# EAGLE board fnordlichtmini_v4_panelized (EAGLE 6.1)
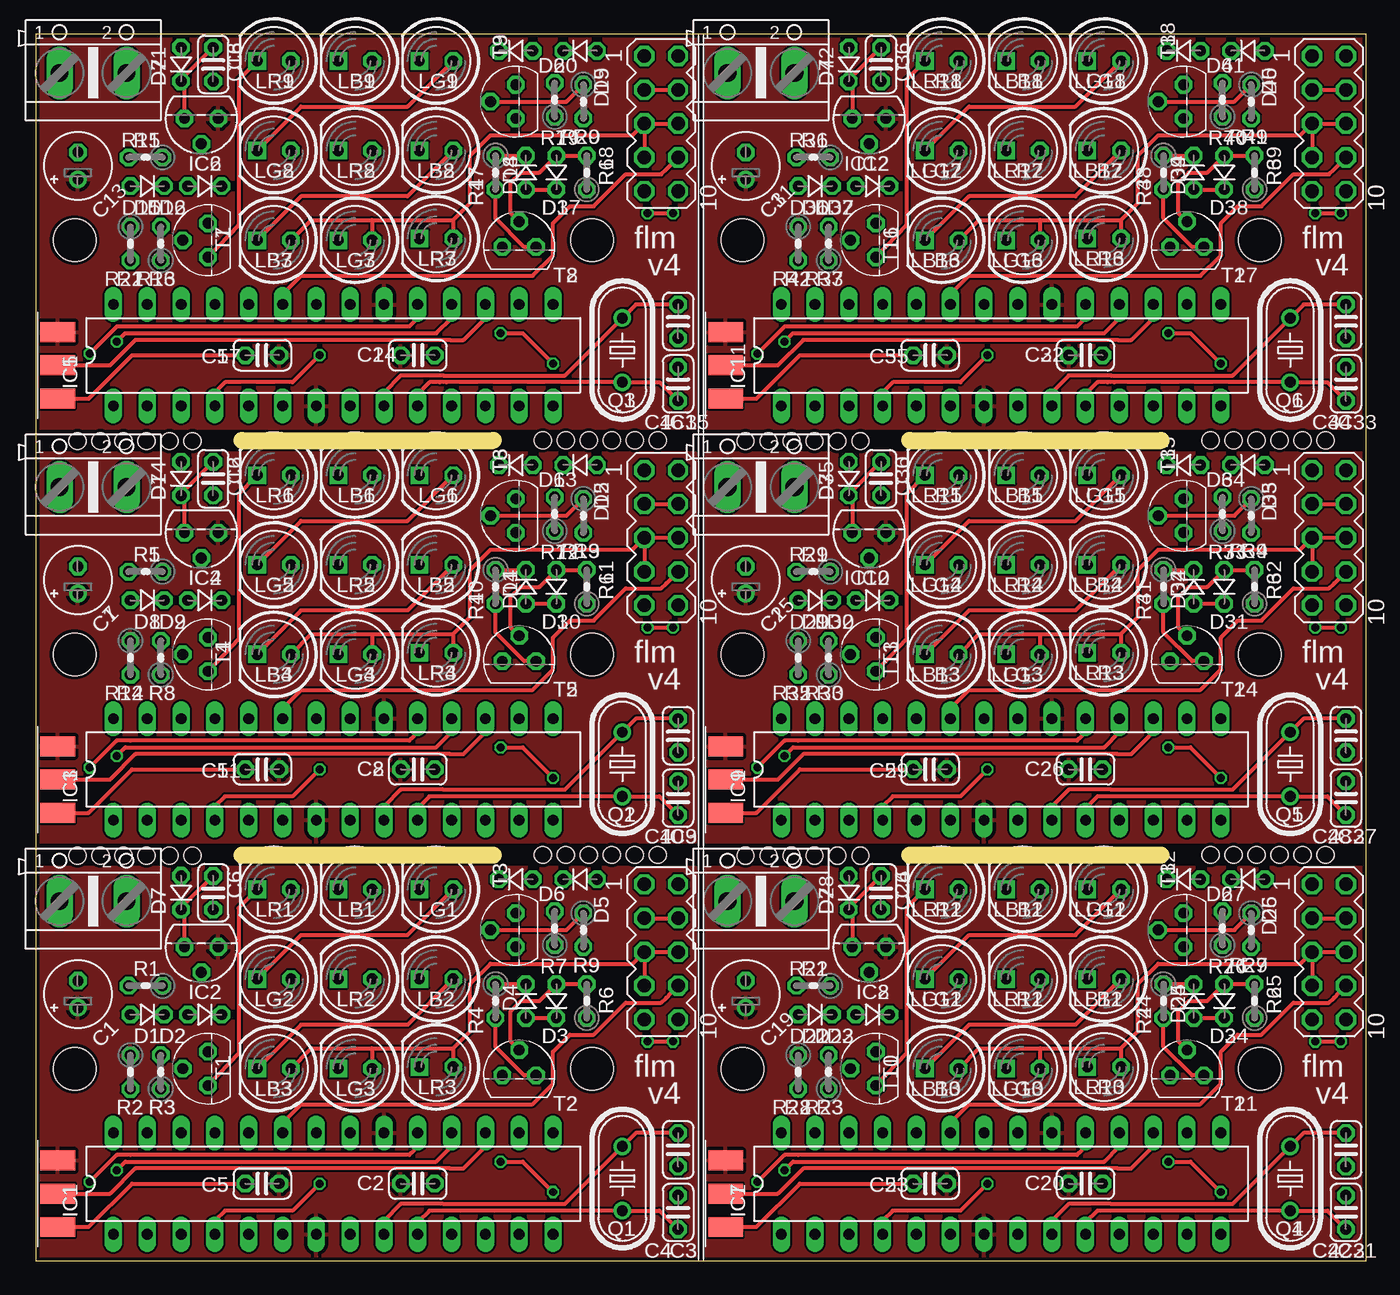
[diagram p0: board, top side]
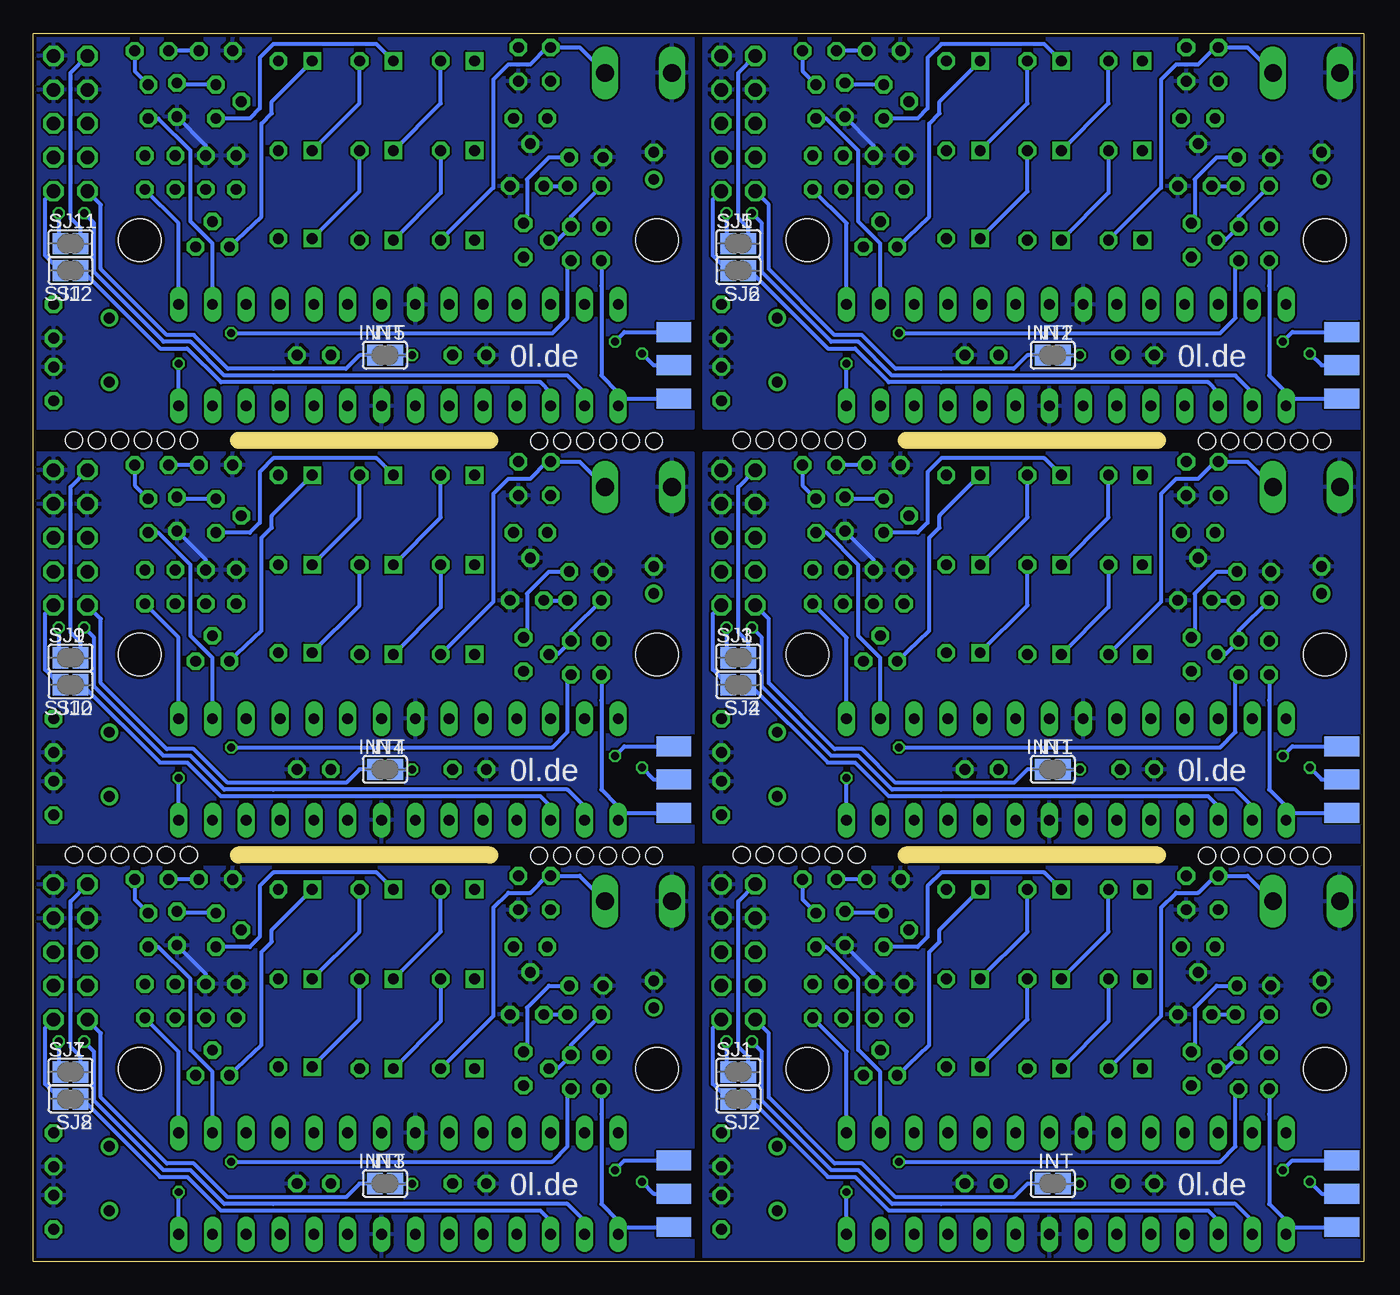
[diagram p1: board, bottom side, seen from below]

Size 99.95 x 92.2 mm. Coordinates in mm from the lower left corner, seen from the top.
Outline: 99.95,0 0,0 0,92.2 99.95,92.2 99.95,0
Copper layers (1*16): Top 0.035mm / dielectric 1.5mm / Bottom 0.035mm
Design rules: minimum track width 6mil, minimum drill 12mil, track to track 6mil, track to pad 6mil, pad to pad 6mil, via to via 6mil, smd to smd 0mil, copper to edge 10mil, drill to drill 10mil, minimum pad ring 10mil, minimum via ring 6mil, stop-mask expansion 2mil, vias tented up to drill 100mil, thermal gap 10mil
Holes 3.2 mm at 2.92,14.48 41.78,14.48 2.92,45.59 41.78,45.59 2.92,76.71 41.78,76.71 53.09,14.48 91.95,14.48 53.09,45.59 91.95,45.59 53.09,76.71 91.95,76.71
Holes 1.27 mm at 3.15,61.62 4.88,61.62 6.6,61.62 8.33,61.62 10.06,61.62 11.79,61.62 38.1,61.67 39.83,61.67 41.55,61.67 43.28,61.67 45.01,61.67 46.74,61.67 3.15,30.48 4.88,30.48 6.6,30.48 8.33,30.48 10.06,30.48 11.79,30.48 38.1,30.53 39.83,30.53 41.55,30.53 43.28,30.53 45.01,30.53 46.74,30.53 53.31,61.62 55.04,61.62 56.77,61.62 58.5,61.62 60.22,61.62 61.95,61.62 88.27,61.67 89.99,61.67 91.72,61.67 93.45,61.67 95.17,61.67 96.9,61.67 53.31,30.48 55.04,30.48 56.77,30.48 58.5,30.48 60.22,30.48 61.95,30.48 88.27,30.53 89.99,30.53 91.72,30.53 93.45,30.53 95.17,30.53 96.9,30.53
Milling: 4 lines

## Footprints (pad centres in the part's own frame; a part is rotated, then mirrored left to right if it is on the bottom)
E2-5 = drill 0.813 pad 1.27: + -1.016,0 | drill 0.813 pad 1.27 octagon: - 1.016,0
C025-024X044 = drill 0.813 octagon: 1 -1.27,0; 2 1.27,0
D-2.5 = drill 0.813 octagon: A 1.27,0; C -1.27,0
DIL28-3 = drill 0.813 long: 1 -16.51,-3.81; 2 -13.97,-3.81; 3 -11.43,-3.81; 4 -8.89,-3.81; 5 -6.35,-3.81; 6 -3.81,-3.81; 7 -1.27,-3.81; 8 1.27,-3.81; 9 3.81,-3.81; 10 6.35,-3.81; 11 8.89,-3.81; 12 11.43,-3.81; 13 13.97,-3.81; 14 16.51,-3.81; 15 16.51,3.81; 16 13.97,3.81; 17 11.43,3.81; 18 8.89,3.81; 19 6.35,3.81; 20 3.81,3.81; 21 1.27,3.81; 22 -1.27,3.81; 23 -3.81,3.81; 24 -6.35,3.81; 25 -8.89,3.81; 26 -11.43,3.81; 27 -13.97,3.81; 28 -16.51,3.81
TO92 = drill 0.813 octagon: 1 -1.27,0; 2 0,1.905; 3 1.27,0
SJ = smd 1.168 x 1.6: 1 -0.762,0; 2 0.762,0
LED5MM = drill 0.813 octagon: A -1.27,0 | drill 0.813 square: K 1.27,0
HC49U-V = drill 0.813: 1 -2.413,0; 2 2.413,0
0204V = drill 0.813 octagon: 1 -1.27,0; 2 1.27,0
MA05-2 = drill 1.016 octagon: 1 -5.08,-1.27; 2 -5.08,1.27; 3 -2.54,-1.27; 4 -2.54,1.27; 5 0,-1.27; 6 0,1.27; 7 2.54,-1.27; 8 2.54,1.27; 9 5.08,-1.27; 10 5.08,1.27
TO92' = drill 0.813 octagon: 1 1.27,0; 2 0,1.905; 3 -1.27,0
6PAD_ISP = smd 1.5 x 2.6: GND -2.5,0.5; MOSI 0,0.5; VCC 2.5,0.5 | smd 1.5 x 2.6 bottom: MISO 2.5,0.5; RST -2.5,0.5; SCK 0,0.5
AK500/2 = drill 1.321 long: 1 -2.515,0; 2 2.515,0

## Placement (x,y rotation side)
C1  47uF  [E2-5]  3.17,20.07 90 top
C2  100n  [C025-024X044]  28.7,5.84 0 top
C3  33p  [C025-024X044]  48.26,8.38 270 top
C4  33p  [C025-024X044]  48.26,3.68 90 top
C5  100n  [C025-024X044]  17.02,5.84 180 top
C6  100n  [C025-024X044]  13.34,27.69 270 top
C7  47uF  [E2-5]  3.17,51.18 90 top
C8  100n  [C025-024X044]  28.7,36.96 0 top
C9  33p  [C025-024X044]  48.26,39.5 270 top
C10  33p  [C025-024X044]  48.26,34.8 90 top
C11  100n  [C025-024X044]  17.02,36.96 180 top
C12  100n  [C025-024X044]  13.34,58.8 270 top
C13  47uF  [E2-5]  3.17,82.3 90 top
C14  100n  [C025-024X044]  28.7,68.07 0 top
C15  33p  [C025-024X044]  48.26,70.61 270 top
C16  33p  [C025-024X044]  48.26,65.91 90 top
C17  100n  [C025-024X044]  17.02,68.07 180 top
C18  100n  [C025-024X044]  13.34,89.92 270 top
C19  47uF  [E2-5]  53.34,20.07 90 top
C20  100n  [C025-024X044]  78.87,5.84 0 top
C21  33p  [C025-024X044]  98.42,8.38 270 top
C22  33p  [C025-024X044]  98.42,3.68 90 top
C23  100n  [C025-024X044]  67.18,5.84 180 top
C24  100n  [C025-024X044]  63.5,27.69 270 top
C25  47uF  [E2-5]  53.34,51.18 90 top
C26  100n  [C025-024X044]  78.87,36.96 0 top
C27  33p  [C025-024X044]  98.42,39.5 270 top
C28  33p  [C025-024X044]  98.42,34.8 90 top
C29  100n  [C025-024X044]  67.18,36.96 180 top
C30  100n  [C025-024X044]  63.5,58.8 270 top
C31  47uF  [E2-5]  53.34,82.3 90 top
C32  100n  [C025-024X044]  78.87,68.07 0 top
C33  33p  [C025-024X044]  98.42,70.61 270 top
C34  33p  [C025-024X044]  98.42,65.91 90 top
C35  100n  [C025-024X044]  67.18,68.07 180 top
C36  100n  [C025-024X044]  63.5,89.92 270 top
D1  [D-2.5]  8.38,18.54 180 top
D2  [D-2.5]  12.7,18.54 180 top
D3  [D-2.5]  39.12,19.56 90 top
D4  [D-2.5]  36.83,19.56 270 top
D5  [D-2.5]  40.89,28.7 0 top
D6  [D-2.5]  36.07,28.7 0 top
D7  [D-2.5]  10.92,27.69 90 top
D8  [D-2.5]  8.38,49.66 180 top
D9  [D-2.5]  12.7,49.66 180 top
D10  [D-2.5]  39.12,50.67 90 top
D11  [D-2.5]  36.83,50.67 270 top
D12  [D-2.5]  40.89,59.82 0 top
D13  [D-2.5]  36.07,59.82 0 top
D14  [D-2.5]  10.92,58.8 90 top
D15  [D-2.5]  8.38,80.77 180 top
D16  [D-2.5]  12.7,80.77 180 top
D17  [D-2.5]  39.12,81.79 90 top
D18  [D-2.5]  36.83,81.79 270 top
D19  [D-2.5]  40.89,90.93 0 top
D20  [D-2.5]  36.07,90.93 0 top
D21  [D-2.5]  10.92,89.92 90 top
D22  [D-2.5]  58.55,18.54 180 top
D23  [D-2.5]  62.87,18.54 180 top
D24  [D-2.5]  89.28,19.56 90 top
D25  [D-2.5]  87,19.56 270 top
D26  [D-2.5]  91.06,28.7 0 top
D27  [D-2.5]  86.23,28.7 0 top
D28  [D-2.5]  61.09,27.69 90 top
D29  [D-2.5]  58.55,49.66 180 top
D30  [D-2.5]  62.87,49.66 180 top
D31  [D-2.5]  89.28,50.67 90 top
D32  [D-2.5]  87,50.67 270 top
D33  [D-2.5]  91.06,59.82 0 top
D34  [D-2.5]  86.23,59.82 0 top
D35  [D-2.5]  61.09,58.8 90 top
D36  [D-2.5]  58.55,80.77 180 top
D37  [D-2.5]  62.87,80.77 180 top
D38  [D-2.5]  89.28,81.79 90 top
D39  [D-2.5]  87,81.79 270 top
D40  [D-2.5]  91.06,90.93 0 top
D41  [D-2.5]  86.23,90.93 0 top
D42  [D-2.5]  61.09,89.92 90 top
IC1  MEGA8-P  [DIL28-3]  22.35,5.84 0 top
IC2  78L05Z  [TO92]  12.45,23.62 180 top
IC3  MEGA8-P  [DIL28-3]  22.35,36.96 0 top
IC4  78L05Z  [TO92]  12.45,54.74 180 top
IC5  MEGA8-P  [DIL28-3]  22.35,68.07 0 top
IC6  78L05Z  [TO92]  12.45,85.85 180 top
IC7  MEGA8-P  [DIL28-3]  72.52,5.84 0 top
IC8  78L05Z  [TO92]  62.61,23.62 180 top
IC9  MEGA8-P  [DIL28-3]  72.52,36.96 0 top
IC10  78L05Z  [TO92]  62.61,54.74 180 top
IC11  MEGA8-P  [DIL28-3]  72.52,68.07 0 top
IC12  78L05Z  [TO92]  62.61,85.85 180 top
INT  [SJ]  23.37,5.84 180 bottom
INT1  [SJ]  23.37,36.96 180 bottom
INT2  [SJ]  23.37,68.07 180 bottom
INT3  [SJ]  73.53,5.84 180 bottom
INT4  [SJ]  73.53,36.96 180 bottom
INT5  [SJ]  73.53,68.07 180 bottom
LB1  [LED5MM]  24,27.94 180 top
LB2  [LED5MM]  30.1,21.21 180 top
LB3  [LED5MM]  17.91,14.48 180 top
LB4  [LED5MM]  17.91,45.59 180 top
LB5  [LED5MM]  30.1,52.32 180 top
LB6  [LED5MM]  24,59.05 180 top
LB7  [LED5MM]  17.91,76.71 180 top
LB8  [LED5MM]  30.1,83.44 180 top
LB9  [LED5MM]  24,90.17 180 top
LB10  [LED5MM]  68.07,14.48 180 top
LB11  [LED5MM]  80.26,21.21 180 top
LB12  [LED5MM]  74.17,27.94 180 top
LB13  [LED5MM]  68.07,45.59 180 top
LB14  [LED5MM]  80.26,52.32 180 top
LB15  [LED5MM]  74.17,59.05 180 top
LB16  [LED5MM]  68.07,76.71 180 top
LB17  [LED5MM]  80.26,83.44 180 top
LB18  [LED5MM]  74.17,90.17 180 top
LG1  [LED5MM]  30.1,27.94 180 top
LG2  [LED5MM]  17.91,21.21 180 top
LG3  [LED5MM]  24,14.48 180 top
LG4  [LED5MM]  24,45.59 180 top
LG5  [LED5MM]  17.91,52.32 180 top
LG6  [LED5MM]  30.1,59.05 180 top
LG7  [LED5MM]  24,76.71 180 top
LG8  [LED5MM]  17.91,83.44 180 top
LG9  [LED5MM]  30.1,90.17 180 top
LG10  [LED5MM]  74.17,14.48 180 top
LG11  [LED5MM]  68.07,21.21 180 top
LG12  [LED5MM]  80.26,27.94 180 top
LG13  [LED5MM]  74.17,45.59 180 top
LG14  [LED5MM]  68.07,52.32 180 top
LG15  [LED5MM]  80.26,59.05 180 top
LG16  [LED5MM]  74.17,76.71 180 top
LG17  [LED5MM]  68.07,83.44 180 top
LG18  [LED5MM]  80.26,90.17 180 top
LR1  [LED5MM]  17.91,27.94 180 top
LR2  [LED5MM]  24,21.21 180 top
LR3  [LED5MM]  30.1,14.61 180 top
LR4  [LED5MM]  30.1,45.72 180 top
LR5  [LED5MM]  24,52.32 180 top
LR6  [LED5MM]  17.91,59.05 180 top
LR7  [LED5MM]  30.1,76.83 180 top
LR8  [LED5MM]  24,83.44 180 top
LR9  [LED5MM]  17.91,90.17 180 top
LR10  [LED5MM]  80.26,14.61 180 top
LR11  [LED5MM]  74.17,21.21 180 top
LR12  [LED5MM]  68.07,27.94 180 top
LR13  [LED5MM]  80.26,45.72 180 top
LR14  [LED5MM]  74.17,52.32 180 top
LR15  [LED5MM]  68.07,59.05 180 top
LR16  [LED5MM]  80.26,76.83 180 top
LR17  [LED5MM]  74.17,83.44 180 top
LR18  [LED5MM]  68.07,90.17 180 top
Q1  16MHz  [HC49U-V]  44.07,6.22 270 top
Q2  16MHz  [HC49U-V]  44.07,37.34 270 top
Q3  16MHz  [HC49U-V]  44.07,68.45 270 top
Q4  16MHz  [HC49U-V]  94.23,6.22 270 top
Q5  16MHz  [HC49U-V]  94.23,37.34 270 top
Q6  16MHz  [HC49U-V]  94.23,68.45 270 top
R1  33R  [0204V]  8.26,20.7 180 top
R2  2k2  [0204V]  7.11,14.22 270 top
R3  2k2  [0204V]  9.4,14.22 90 top
R4  33R  [0204V]  34.54,19.56 270 top
R5  33R  [0204V]  8.26,51.82 180 top
R6  2k2  [0204V]  41.4,19.56 90 top
R7  33R  [0204V]  38.99,25.02 90 top
R8  2k2  [0204V]  9.4,45.34 90 top
R9  2k2  [0204V]  41.15,24.89 270 top
R10  33R  [0204V]  34.54,50.67 270 top
R11  2k2  [0204V]  41.4,50.67 90 top
R12  33R  [0204V]  38.99,56.13 90 top
R13  2k2  [0204V]  41.15,56.01 270 top
R14  2k2  [0204V]  7.11,45.34 270 top
R15  33R  [0204V]  8.26,82.93 180 top
R16  2k2  [0204V]  9.4,76.45 90 top
R17  33R  [0204V]  34.54,81.79 270 top
R18  2k2  [0204V]  41.4,81.79 90 top
R19  33R  [0204V]  38.99,87.25 90 top
R20  2k2  [0204V]  41.15,87.12 270 top
R21  2k2  [0204V]  7.11,76.45 270 top
R22  33R  [0204V]  58.42,20.7 180 top
R23  2k2  [0204V]  59.56,14.22 90 top
R24  33R  [0204V]  84.71,19.56 270 top
R25  2k2  [0204V]  91.57,19.56 90 top
R26  33R  [0204V]  89.15,25.02 90 top
R27  2k2  [0204V]  91.31,24.89 270 top
R28  2k2  [0204V]  57.28,14.22 270 top
R29  33R  [0204V]  58.42,51.82 180 top
R30  2k2  [0204V]  59.56,45.34 90 top
R31  33R  [0204V]  84.71,50.67 270 top
R32  2k2  [0204V]  91.57,50.67 90 top
R33  33R  [0204V]  89.15,56.13 90 top
R34  2k2  [0204V]  91.31,56.01 270 top
R35  2k2  [0204V]  57.28,45.34 270 top
R36  33R  [0204V]  58.42,82.93 180 top
R37  2k2  [0204V]  59.56,76.45 90 top
R38  33R  [0204V]  84.71,81.79 270 top
R39  2k2  [0204V]  91.57,81.79 90 top
R40  33R  [0204V]  89.15,87.25 90 top
R41  2k2  [0204V]  91.31,87.12 270 top
R42  2k2  [0204V]  57.28,76.45 270 top
SJ1  [SJ]  46.99,14.22 0 bottom
SJ2  [SJ]  46.99,12.19 180 bottom
SJ3  [SJ]  46.99,45.34 0 bottom
SJ4  [SJ]  46.99,43.31 180 bottom
SJ5  [SJ]  46.99,76.45 0 bottom
SJ6  [SJ]  46.99,74.42 180 bottom
SJ7  [SJ]  97.16,14.22 0 bottom
SJ8  [SJ]  97.16,12.19 180 bottom
SJ9  [SJ]  97.16,45.34 0 bottom
SJ10  [SJ]  97.16,43.31 180 bottom
SJ11  [SJ]  97.16,76.45 0 bottom
SJ12  [SJ]  97.16,74.42 180 bottom
SV1  [MA05-2]  46.99,23.24 270 top
SV2  [MA05-2]  46.99,54.36 270 top
SV3  [MA05-2]  46.99,85.47 270 top
SV4  [MA05-2]  97.16,23.24 270 top
SV5  [MA05-2]  97.16,54.36 270 top
SV6  [MA05-2]  97.16,85.47 270 top
T1  bc550c  [TO92']  12.95,14.48 90 top
T2  bc550c  [TO92']  36.32,13.97 0 top
T3  bc550c  [TO92']  36.07,24.89 90 top
T4  bc550c  [TO92']  12.95,45.59 90 top
T5  bc550c  [TO92']  36.32,45.09 0 top
T6  bc550c  [TO92']  36.07,56.01 90 top
T7  bc550c  [TO92']  12.95,76.71 90 top
T8  bc550c  [TO92']  36.32,76.2 0 top
T9  bc550c  [TO92']  36.07,87.12 90 top
T10  bc550c  [TO92']  63.12,14.48 90 top
T11  bc550c  [TO92']  86.49,13.97 0 top
T12  bc550c  [TO92']  86.23,24.89 90 top
T13  bc550c  [TO92']  63.12,45.59 90 top
T14  bc550c  [TO92']  86.49,45.09 0 top
T15  bc550c  [TO92']  86.23,56.01 90 top
T16  bc550c  [TO92']  63.12,76.71 90 top
T17  bc550c  [TO92']  86.49,76.2 0 top
T18  bc550c  [TO92']  86.23,87.12 90 top
U$1  AVR-ISP-6-EDGE  [6PAD_ISP]  2.16,5.08 90 top
U$2  AVR-ISP-6-EDGE  [6PAD_ISP]  2.16,36.2 90 top
U$3  AVR-ISP-6-EDGE  [6PAD_ISP]  2.16,67.31 90 top
U$4  AVR-ISP-6-EDGE  [6PAD_ISP]  52.32,5.08 90 top
U$5  AVR-ISP-6-EDGE  [6PAD_ISP]  52.32,36.2 90 top
U$6  AVR-ISP-6-EDGE  [6PAD_ISP]  52.32,67.31 90 top
X1  [AK500/2]  4.32,27.05 0 top
X2  [AK500/2]  4.32,58.17 0 top
X3  [AK500/2]  4.32,89.28 0 top
X4  [AK500/2]  54.48,27.05 0 top
X5  [AK500/2]  54.48,58.17 0 top
X6  [AK500/2]  54.48,89.28 0 top

## Library data of the parts
C1-C36 R1-R42 = rcl
D1-D42 = diode
IC1 IC3 IC5 IC7 IC9 IC11 = atmel
IC2 IC4 IC6 IC8 IC10 IC12 = linear
INT INT1-INT5 SJ1-SJ12 = jumper
LB1-LB18 LG1-LG18 LR1-LR18 = led-mark
Q1-Q6 = crystal
SV1-SV6 = con-lstb
T1-T18 = transistor
U$1-U$6 = isp
X1-X6 = con-ptr500

## Nets
+5V: C1.+ C2.1 C5.1 IC1.7 IC1.20 IC2.1 R2.1 U$1.VCC
+5V1: C7.+ C8.1 C11.1 IC3.7 IC3.20 IC4.1 R14.1 U$2.VCC
+5V2: C13.+ C14.1 C17.1 IC5.7 IC5.20 IC6.1 R21.1 U$3.VCC
+5V3: C19.+ C20.1 C23.1 IC7.7 IC7.20 IC8.1 R28.1 U$4.VCC
+5V4: C25.+ C26.1 C29.1 IC9.7 IC9.20 IC10.1 R35.1 U$5.VCC
+5V5: C31.+ C32.1 C35.1 IC11.7 IC11.20 IC12.1 R42.1 U$6.VCC
+12V: D7.A LB3.A LG3.A LR3.A SV1.5 SV1.6 SV1.7 X1.2
+12V1: D14.A LB4.A LG4.A LR4.A SV2.5 SV2.6 SV2.7 X2.2
+12V2: D21.A LB7.A LG7.A LR7.A SV3.5 SV3.6 SV3.7 X3.2
+12V3: D28.A LB10.A LG10.A LR10.A SV4.5 SV4.6 SV4.7 X4.2
+12V4: D35.A LB13.A LG13.A LR13.A SV5.5 SV5.6 SV5.7 X5.2
+12V5: D42.A LB16.A LG16.A LR16.A SV6.5 SV6.6 SV6.7 X6.2
ADC0: IC1.23 SV1.8
ADC1: IC3.23 SV2.8
ADC2: IC5.23 SV3.8
ADC3: IC7.23 SV4.8
ADC4: IC9.23 SV5.8
ADC5: IC11.23 SV6.8
BLUE: IC1.16 R9.2
BLUE1: IC3.16 R13.2
BLUE2: IC1.13
BLUE3: IC3.13
BLUE4: IC5.16 R20.2
BLUE5: IC5.13
BLUE6: IC7.16 R27.2
BLUE7: IC7.13
BLUE8: IC9.16 R34.2
BLUE9: IC9.13
BLUE10: IC11.16 R41.2
BLUE11: IC11.13
BUSINT: INT.2 SV1.9
BUSINT1: INT1.2 SV2.9
BUSINT2: INT2.2 SV3.9
BUSINT3: INT3.2 SV4.9
BUSINT4: INT4.2 SV5.9
BUSINT5: INT5.2 SV6.9
DATA1: SJ2.2 SV1.10
DATA2: SJ1.2 SV1.1
DATA3: SJ4.2 SV2.10
DATA4: SJ3.2 SV2.1
DATA5: SJ6.2 SV3.10
DATA6: SJ5.2 SV3.1
DATA7: SJ8.2 SV4.10
DATA8: SJ7.2 SV4.1
DATA9: SJ10.2 SV5.10
DATA10: SJ9.2 SV5.1
DATA11: SJ12.2 SV6.10
DATA12: SJ11.2 SV6.1
GND: C1.- C2.2 C3.2 C4.2 C5.2 C6.2 D2.C D4.C D6.C IC1.8 IC1.22 IC2.2 R1.2 R4.1 R7.1 SV1.2 SV1.3 SV1.4 U$1.GND X1.1
GND1: C7.- C8.2 C9.2 C10.2 C11.2 C12.2 D9.C D11.C D13.C IC3.8 IC3.22 IC4.2 R5.2 R10.1 R12.1 SV2.2 SV2.3 SV2.4 U$2.GND X2.1
GND2: C13.- C14.2 C15.2 C16.2 C17.2 C18.2 D16.C D18.C D20.C IC5.8 IC5.22 IC6.2 R15.2 R17.1 R19.1 SV3.2 SV3.3 SV3.4 U$3.GND X3.1
GND3: C19.- C20.2 C21.2 C22.2 C23.2 C24.2 D23.C D25.C D27.C IC7.8 IC7.22 IC8.2 R22.2 R24.1 R26.1 SV4.2 SV4.3 SV4.4 U$4.GND X4.1
GND4: C25.- C26.2 C27.2 C28.2 C29.2 C30.2 D30.C D32.C D34.C IC9.8 IC9.22 IC10.2 R29.2 R31.1 R33.1 SV5.2 SV5.3 SV5.4 U$5.GND X5.1
GND5: C31.- C32.2 C33.2 C34.2 C35.2 C36.2 D37.C D39.C D41.C IC11.8 IC11.22 IC12.2 R36.2 R38.1 R40.1 SV6.2 SV6.3 SV6.4 U$6.GND X6.1
GREEN: IC1.15 R6.1
GREEN1: IC3.15 R11.1
GREEN2: IC1.12
GREEN3: IC3.12
GREEN4: IC5.15 R18.1
GREEN5: IC5.12
GREEN6: IC7.15 R25.1
GREEN7: IC7.12
GREEN8: IC9.15 R32.1
GREEN9: IC9.12
GREEN10: IC11.15 R39.1
GREEN11: IC11.12
INT0: IC1.4 INT.1
INT1: IC3.4 INT1.1
INT2: IC5.4 INT2.1
INT3: IC7.4 INT3.1
INT4: IC9.4 INT4.1
INT5: IC11.4 INT5.1
MISO: IC1.18 U$1.MISO
MISO1: IC3.18 U$2.MISO
MISO2: IC5.18 U$3.MISO
MISO3: IC7.18 U$4.MISO
MISO4: IC9.18 U$5.MISO
MISO5: IC11.18 U$6.MISO
MOSI: IC1.17 U$1.MOSI
MOSI1: IC3.17 U$2.MOSI
MOSI2: IC5.17 U$3.MOSI
MOSI3: IC7.17 U$4.MOSI
MOSI4: IC9.17 U$5.MOSI
MOSI5: IC11.17 U$6.MOSI
N$1: LR2.A LR3.K
N$2: LR1.A LR2.K
N$3: LR1.K T1.3
N$4: D1.C D2.A
N$5: R1.1 T1.1
N$6: LR4.K LR5.A
N$7: D1.A R3.2 T1.2
N$8: LG2.A LG3.K
N$9: LG1.A LG2.K
N$10: LG1.K T2.3
N$11: D3.C D4.A
N$12: R4.2 T2.1
N$13: LR5.K LR6.A
N$14: D3.A R6.2 T2.2
N$15: LB2.A LB3.K
N$16: LB1.A LB2.K
N$17: LB1.K T3.3
N$18: D5.C D6.A
N$19: R7.2 T3.1
N$20: D8.C D9.A
N$21: D5.A R9.1 T3.2
N$22: C6.1 D7.C IC2.3
N$23: D8.A R8.2 T4.2
N$24: LG4.K LG5.A
N$25: LG5.K LG6.A
N$26: D10.C D11.A
N$27: D10.A R11.2 T5.2
N$28: LB4.K LB5.A
N$29: LB5.K LB6.A
N$30: D12.C D13.A
N$31: D12.A R13.1 T6.2
N$32: LR6.K T4.3
N$33: R5.1 T4.1
N$34: LG6.K T5.3
N$35: R10.2 T5.1
N$36: LB6.K T6.3
N$37: R12.2 T6.1
N$38: C12.1 D14.C IC4.3
N$39: LR7.K LR8.A
N$40: LR8.K LR9.A
N$41: D15.C D16.A
N$42: D15.A R16.2 T7.2
N$43: LG7.K LG8.A
N$44: LG8.K LG9.A
N$45: D17.C D18.A
N$46: D17.A R18.2 T8.2
N$47: LB7.K LB8.A
N$48: LB8.K LB9.A
N$49: D19.C D20.A
N$50: D19.A R20.1 T9.2
N$51: LR9.K T7.3
N$52: R15.1 T7.1
N$53: LG9.K T8.3
N$54: R17.2 T8.1
N$55: LB9.K T9.3
N$56: R19.2 T9.1
N$57: C18.1 D21.C IC6.3
N$58: LR10.K LR11.A
N$59: LR11.K LR12.A
N$60: D22.C D23.A
N$61: D22.A R23.2 T10.2
N$62: LG10.K LG11.A
N$63: LG11.K LG12.A
N$64: D24.C D25.A
N$65: D24.A R25.2 T11.2
N$66: LB10.K LB11.A
N$67: LB11.K LB12.A
N$68: D26.C D27.A
N$69: D26.A R27.1 T12.2
N$70: LR12.K T10.3
N$71: R22.1 T10.1
N$72: LG12.K T11.3
N$73: R24.2 T11.1
N$74: LB12.K T12.3
N$75: R26.2 T12.1
N$76: C24.1 D28.C IC8.3
N$77: LR13.K LR14.A
N$78: LR14.K LR15.A
N$79: D29.C D30.A
N$80: D29.A R30.2 T13.2
N$81: LG13.K LG14.A
N$82: LG14.K LG15.A
N$83: D31.C D32.A
N$84: D31.A R32.2 T14.2
N$85: LB13.K LB14.A
N$86: LB14.K LB15.A
N$87: D33.C D34.A
N$88: D33.A R34.1 T15.2
N$89: LR15.K T13.3
N$90: R29.1 T13.1
N$91: LG15.K T14.3
N$92: R31.2 T14.1
N$93: LB15.K T15.3
N$94: R33.2 T15.1
N$95: C30.1 D35.C IC10.3
N$96: LR16.K LR17.A
N$97: LR17.K LR18.A
N$98: D36.C D37.A
N$99: D36.A R37.2 T16.2
N$100: LG16.K LG17.A
N$101: LG17.K LG18.A
N$102: D38.C D39.A
N$103: D38.A R39.2 T17.2
N$104: LB16.K LB17.A
N$105: LB17.K LB18.A
N$106: D40.C D41.A
N$107: D40.A R41.1 T18.2
N$108: LR18.K T16.3
N$109: R36.1 T16.1
N$110: LG18.K T17.3
N$111: R38.2 T17.1
N$112: LB18.K T18.3
N$113: R40.2 T18.1
N$114: C36.1 D42.C IC12.3
RED: IC1.14 R3.1
RED1: IC3.14 R8.1
RED2: IC1.11
RED3: IC3.11
RED4: IC5.14 R16.1
RED5: IC5.11
RED6: IC7.14 R23.1
RED7: IC7.11
RED8: IC9.14 R30.1
RED9: IC9.11
RED10: IC11.14 R37.1
RED11: IC11.11
RST: IC1.1 R2.2 U$1.RST
RST1: IC3.1 R14.2 U$2.RST
RST2: IC5.1 R21.2 U$3.RST
RST3: IC7.1 R28.2 U$4.RST
RST4: IC9.1 R35.2 U$5.RST
RST5: IC11.1 R42.2 U$6.RST
RX: IC1.2 SJ1.1
RX1: IC3.2 SJ3.1
RX2: IC5.2 SJ5.1
RX3: IC7.2 SJ7.1
RX4: IC9.2 SJ9.1
RX5: IC11.2 SJ11.1
SCK: IC1.19 U$1.SCK
SCK1: IC3.19 U$2.SCK
SCK2: IC5.19 U$3.SCK
SCK3: IC7.19 U$4.SCK
SCK4: IC9.19 U$5.SCK
SCK5: IC11.19 U$6.SCK
TX: IC1.3 SJ2.1
TX1: IC3.3 SJ4.1
TX2: IC5.3 SJ6.1
TX3: IC7.3 SJ8.1
TX4: IC9.3 SJ10.1
TX5: IC11.3 SJ12.1
XTAL1: C3.1 IC1.9 Q1.1
XTAL2: C4.1 IC1.10 Q1.2
XTAL3: C9.1 IC3.9 Q2.1
XTAL4: C10.1 IC3.10 Q2.2
XTAL5: C15.1 IC5.9 Q3.1
XTAL6: C16.1 IC5.10 Q3.2
XTAL7: C21.1 IC7.9 Q4.1
XTAL8: C22.1 IC7.10 Q4.2
XTAL9: C27.1 IC9.9 Q5.1
XTAL10: C28.1 IC9.10 Q5.2
XTAL11: C33.1 IC11.9 Q6.1
XTAL12: C34.1 IC11.10 Q6.2

## Tracks (layer width: path | path; a pad name or v marks a point on that pad's centre or on a via)
+5V
  pour Top: 0,29.59 49.53,29.59 49.53,0 0,0
+5V1
  pour Top: 0,60.71 49.53,60.71 49.53,31.5 0,31.5
+5V2
  pour Top: 0,92.2 49.53,92.2 49.53,62.61 0,62.61
+5V3
  pour Top: 50.42,29.59 99.95,29.59 99.95,0 50.42,0
+5V4
  pour Top: 50.42,60.71 99.95,60.71 99.95,31.5 50.42,31.5
+5V5
  pour Top: 50.42,92.2 99.95,92.2 99.95,62.61 50.42,62.61
+12V
  Top 0.305: LB3.A 20.7,16 25.27,16 | 25.27,16 LG3.A | 25.27,16 31.37,16 | 31.37,16 LR3.A | 31.37,16 32.64,17.27 32.64,20.83 34.16,22.35 44.83,22.35 SV1.5 | SV1.5 SV1.6 | SV1.5 SV1.7
  Bottom 0.305: X1.2 8.74,28.96 D7.A 11.18,28.96 12.45,27.69 14.1,27.69 15.24,26.54 15.24,18.41 LB3.A
+12V1
  Top 0.305: LB4.A 20.7,47.12 25.27,47.12 | 25.27,47.12 LG4.A | 25.27,47.12 31.37,47.12 | 31.37,47.12 LR4.A | 31.37,47.12 32.64,48.39 32.64,51.94 34.16,53.47 44.83,53.47 SV2.5 | SV2.5 SV2.6 | SV2.5 SV2.7
  Bottom 0.305: X2.2 8.74,60.07 D14.A 11.18,60.07 12.45,58.8 14.1,58.8 15.24,57.66 15.24,49.53 LB4.A
+12V2
  Top 0.305: LB7.A 20.7,78.23 25.27,78.23 | 25.27,78.23 LG7.A | 25.27,78.23 31.37,78.23 | 31.37,78.23 LR7.A | 31.37,78.23 32.64,79.5 32.64,83.06 34.16,84.58 44.83,84.58 SV3.5 | SV3.5 SV3.6 | SV3.5 SV3.7
  Bottom 0.305: X3.2 8.74,91.19 D21.A 11.18,91.19 12.45,89.92 14.1,89.92 15.24,88.77 15.24,80.64 LB7.A
+12V3
  Top 0.305: LB10.A 70.87,16 75.44,16 | 75.44,16 LG10.A | 75.44,16 81.53,16 | 81.53,16 LR10.A | 81.53,16 82.8,17.27 82.8,20.83 84.33,22.35 95,22.35 SV4.5 | SV4.5 SV4.6 | SV4.5 SV4.7
  Bottom 0.305: X4.2 58.9,28.96 D28.A 61.34,28.96 62.61,27.69 64.26,27.69 65.41,26.54 65.41,18.41 LB10.A
+12V4
  Top 0.305: LB13.A 70.87,47.12 75.44,47.12 | 75.44,47.12 LG13.A | 75.44,47.12 81.53,47.12 | 81.53,47.12 LR13.A | 81.53,47.12 82.8,48.39 82.8,51.94 84.33,53.47 95,53.47 SV5.5 | SV5.5 SV5.6 | SV5.5 SV5.7
  Bottom 0.305: X5.2 58.9,60.07 D35.A 61.34,60.07 62.61,58.8 64.26,58.8 65.41,57.66 65.41,49.53 LB13.A
+12V5
  Top 0.305: LB16.A 70.87,78.23 75.44,78.23 | 75.44,78.23 LG16.A | 75.44,78.23 81.53,78.23 | 81.53,78.23 LR16.A | 81.53,78.23 82.8,79.5 82.8,83.06 84.33,84.58 95,84.58 SV6.5 | SV6.5 SV6.6 | SV6.5 SV6.7
  Bottom 0.305: X6.2 58.9,91.19 D42.A 61.34,91.19 62.61,89.92 64.26,89.92 65.41,88.77 65.41,80.64 LB16.A
ADC0
  Top 0.305: IC1.23 18.54,10.41 19.94,11.81 37.34,11.81 38.86,13.34 38.86,15.75 40.13,17.02 41.91,17.02 44.32,19.43 46.99,19.43 47.37,19.81 47.75,20.19 SV1.8
ADC1
  Top 0.305: IC3.23 18.54,41.53 19.94,42.93 37.34,42.93 38.86,44.45 38.86,46.86 40.13,48.13 41.91,48.13 44.32,50.55 46.99,50.55 47.37,50.93 47.75,51.31 SV2.8
ADC2
  Top 0.305: IC5.23 18.54,72.64 19.94,74.04 37.34,74.04 38.86,75.56 38.86,77.98 40.13,79.25 41.91,79.25 44.32,81.66 46.99,81.66 47.37,82.04 47.75,82.42 SV3.8
ADC3
  Top 0.305: IC7.23 68.71,10.41 70.1,11.81 87.5,11.81 89.03,13.34 89.03,15.75 90.3,17.02 92.08,17.02 94.49,19.43 97.16,19.43 97.54,19.81 97.92,20.19 SV4.8
ADC4
  Top 0.305: IC9.23 68.71,41.53 70.1,42.93 87.5,42.93 89.03,44.45 89.03,46.86 90.3,48.13 92.08,48.13 94.49,50.55 97.16,50.55 97.54,50.93 97.92,51.31 SV5.8
ADC5
  Top 0.305: IC11.23 68.71,72.64 70.1,74.04 87.5,74.04 89.03,75.56 89.03,77.98 90.3,79.25 92.08,79.25 94.49,81.66 97.16,81.66 97.54,82.04 97.92,82.42 SV6.8
BLUE
  Bottom 0.305: IC1.16 36.32,14.22 37.97,15.88 37.97,21.21 40.39,23.62 R9.2
BLUE1
  Bottom 0.305: IC3.16 36.32,45.34 37.97,46.99 37.97,52.32 40.39,54.74 R13.2
BLUE4
  Bottom 0.305: IC5.16 36.32,76.45 37.97,78.11 37.97,83.44 40.39,85.85 R20.2
BLUE6
  Bottom 0.305: IC7.16 86.49,14.22 88.14,15.88 88.14,21.21 90.55,23.62 R27.2
BLUE8
  Bottom 0.305: IC9.16 86.49,45.34 88.14,46.99 88.14,52.32 90.55,54.74 R34.2
BLUE10
  Bottom 0.305: IC11.16 86.49,76.45 88.14,78.11 88.14,83.44 90.55,85.85 R41.2
BUSINT
  Bottom 0.305: INT.2 25.27,5.84 26.29,4.83 31.75,4.83 35.18,4.83 37.72,7.37 39.75,7.37 44.7,12.32 44.7,17.14 SV1.9
BUSINT1
  Bottom 0.305: INT1.2 25.27,36.96 26.29,35.94 31.75,35.94 35.18,35.94 37.72,38.48 39.75,38.48 44.7,43.43 44.7,48.26 SV2.9
BUSINT2
  Bottom 0.305: INT2.2 25.27,68.07 26.29,67.06 31.75,67.06 35.18,67.06 37.72,69.6 39.75,69.6 44.7,74.55 44.7,79.38 SV3.9
BUSINT3
  Bottom 0.305: INT3.2 75.44,5.84 76.45,4.83 81.92,4.83 85.34,4.83 87.88,7.37 89.92,7.37 94.87,12.32 94.87,17.14 SV4.9
BUSINT4
  Bottom 0.305: INT4.2 75.44,36.96 76.45,35.94 81.92,35.94 85.34,35.94 87.88,38.48 89.92,38.48 94.87,43.43 94.87,48.26 SV5.9
BUSINT5
  Bottom 0.305: INT5.2 75.44,68.07 76.45,67.06 81.92,67.06 85.34,67.06 87.88,69.6 89.92,69.6 94.87,74.55 94.87,79.38 SV6.9
DATA1
  Bottom 0.305: SV1.10 48.9,17.53 48.9,13.34 SJ2.2
DATA2
  Bottom 0.305: SV1.1 46.99,27.05 46.99,16.13 46.23,15.37 SJ1.2
DATA3
  Bottom 0.305: SV2.10 48.9,48.64 48.9,44.45 SJ4.2
DATA4
  Bottom 0.305: SV2.1 46.99,58.17 46.99,47.24 46.23,46.48 SJ3.2
DATA5
  Bottom 0.305: SV3.10 48.9,79.76 48.9,75.56 SJ6.2
DATA6
  Bottom 0.305: SV3.1 46.99,89.28 46.99,78.36 46.23,77.6 SJ5.2
DATA7
  Bottom 0.305: SV4.10 99.06,17.53 99.06,13.34 SJ8.2
DATA8
  Bottom 0.305: SV4.1 97.16,27.05 97.16,16.13 96.39,15.37 SJ7.2
DATA9
  Bottom 0.305: SV5.10 99.06,48.64 99.06,44.45 SJ10.2
DATA10
  Bottom 0.305: SV5.1 97.16,58.17 97.16,47.24 96.39,46.48 SJ9.2
DATA11
  Bottom 0.305: SV6.10 99.06,79.76 99.06,75.56 SJ12.2
DATA12
  Bottom 0.305: SV6.1 97.16,89.28 97.16,78.36 96.39,77.6 SJ11.2
GND
  Top 0.305: R4.1 D4.C | SV1.3 SV1.4 | U$1.GND 3.98,2.58 7.24,5.84 C5.2
  Bottom 0.305: R7.1 36.83,21.59 D4.C
  pour Bottom: 0,0 49.53,0 49.53,29.59 0,29.59
GND1
  Top 0.305: R10.1 D11.C | SV2.3 SV2.4 | U$2.GND 3.98,33.7 7.24,36.96 C11.2
  Bottom 0.305: R12.1 36.83,52.7 D11.C
  pour Bottom: 0,31.5 49.53,31.5 49.53,60.71 0,60.71
GND2
  Top 0.305: R17.1 D18.C | SV3.3 SV3.4 | U$3.GND 3.98,64.81 7.24,68.07 C17.2
  Bottom 0.305: R19.1 36.83,83.82 D18.C
  pour Bottom: 0,62.61 49.53,62.61 49.53,92.2 0,92.2
GND3
  Top 0.305: R24.1 D25.C | SV4.3 SV4.4 | U$4.GND 54.14,2.58 57.4,5.84 C23.2
  Bottom 0.305: R26.1 87,21.59 D25.C
  pour Bottom: 50.42,0 99.95,0 99.95,29.59 50.42,29.59
GND4
  Top 0.305: R31.1 D32.C | SV5.3 SV5.4 | U$5.GND 54.14,33.7 57.4,36.96 C29.2
  Bottom 0.305: R33.1 87,52.7 D32.C
  pour Bottom: 50.42,31.5 99.95,31.5 99.95,60.71 50.42,60.71
GND5
  Top 0.305: R38.1 D39.C | SV6.3 SV6.4 | U$6.GND 54.14,64.81 57.4,68.07 C35.2
  Bottom 0.305: R40.1 87,83.82 D39.C
  pour Bottom: 50.42,62.61 99.95,62.61 99.95,92.2 50.42,92.2
GREEN
  Bottom 0.305: R6.1 38.86,15.75 IC1.15
GREEN1
  Bottom 0.305: R11.1 38.86,46.86 IC3.15
GREEN4
  Bottom 0.305: R18.1 38.86,77.98 IC5.15
GREEN6
  Bottom 0.305: R25.1 89.03,15.75 IC7.15
GREEN8
  Bottom 0.305: R32.1 89.03,46.86 IC9.15
GREEN10
  Bottom 0.305: R39.1 89.03,77.98 IC11.15
INT0  (via drill 0.6)
  Top 0.305: v21.34,5.84 19.3,3.81 14.22,3.81 13.46,3.05 IC1.4
  Bottom 0.305: INT.1 v21.34,5.84
INT1  (via drill 0.6)
  Top 0.305: v21.34,36.96 19.3,34.92 14.22,34.92 13.46,34.16 IC3.4
  Bottom 0.305: INT1.1 v21.34,36.96
INT2  (via drill 0.6)
  Top 0.305: v21.34,68.07 19.3,66.04 14.22,66.04 13.46,65.28 IC5.4
  Bottom 0.305: INT2.1 v21.34,68.07
INT3  (via drill 0.6)
  Top 0.305: v71.5,5.84 69.47,3.81 64.39,3.81 63.63,3.05 IC7.4
  Bottom 0.305: INT3.1 v71.5,5.84
INT4  (via drill 0.6)
  Top 0.305: v71.5,36.96 69.47,34.92 64.39,34.92 63.63,34.16 IC9.4
  Bottom 0.305: INT4.1 v71.5,36.96
INT5  (via drill 0.6)
  Top 0.305: v71.5,68.07 69.47,66.04 64.39,66.04 63.63,65.28 IC11.4
  Bottom 0.305: INT5.1 v71.5,68.07
MISO  (via drill 0.6)
  Top 0.305: IC1.18 31.24,8.64 30.1,7.49 6.73,7.49 v6.1,6.86
  Bottom 0.305: 2.67,7.62 1.57,7.62 U$1.MISO 5.37,7.58 v6.1,6.86
MISO1  (via drill 0.6)
  Top 0.305: IC3.18 31.24,39.75 30.1,38.61 6.73,38.61 v6.1,37.97
  Bottom 0.305: 2.67,38.73 1.57,38.73 U$2.MISO 5.37,38.7 v6.1,37.97
MISO2  (via drill 0.6)
  Top 0.305: IC5.18 31.24,70.87 30.1,69.72 6.73,69.72 v6.1,69.09
  Bottom 0.305: 2.67,69.85 1.57,69.85 U$3.MISO 5.37,69.81 v6.1,69.09
MISO3  (via drill 0.6)
  Top 0.305: IC7.18 81.41,8.64 80.26,7.49 56.9,7.49 v56.26,6.86
  Bottom 0.305: 52.83,7.62 51.74,7.62 U$4.MISO 55.54,7.58 v56.26,6.86
MISO4  (via drill 0.6)
  Top 0.305: IC9.18 81.41,39.75 80.26,38.61 56.9,38.61 v56.26,37.97
  Bottom 0.305: 52.83,38.73 51.74,38.73 U$5.MISO 55.54,38.7 v56.26,37.97
MISO5  (via drill 0.6)
  Top 0.305: IC11.18 81.41,70.87 80.26,69.72 56.9,69.72 v56.26,69.09
  Bottom 0.305: 52.83,69.85 51.74,69.85 U$6.MISO 55.54,69.81 v56.26,69.09
MOSI
  Top 0.305: IC1.17 33.78,8.64 32.13,6.99 31.11,6.99 7.49,6.99 5.59,5.08 U$1.MOSI
MOSI1
  Top 0.305: IC3.17 33.78,39.75 32.13,38.1 31.11,38.1 7.49,38.1 5.59,36.2 U$2.MOSI
MOSI2
  Top 0.305: IC5.17 33.78,70.87 32.13,69.22 31.11,69.22 7.49,69.22 5.59,67.31 U$3.MOSI
MOSI3
  Top 0.305: IC7.17 83.95,8.64 82.3,6.99 81.28,6.99 57.66,6.99 55.75,5.08 U$4.MOSI
MOSI4
  Top 0.305: IC9.17 83.95,39.75 82.3,38.1 81.28,38.1 57.66,38.1 55.75,36.2 U$5.MOSI
MOSI5
  Top 0.305: IC11.17 83.95,70.87 82.3,69.22 81.28,69.22 57.66,69.22 55.75,67.31 U$6.MOSI
N$1
  Bottom 0.305: LR2.A 25.27,18.16 LR3.K
N$2
  Bottom 0.305: LR1.A 19.18,24.77 LR2.K
N$3
  Top 0.305: T1.3 15.24,15.62 15.24,26.54 LR1.K
N$4
  Bottom 0.305: D2.A D1.C
N$5
  Bottom 0.305: T1.1 12.7,16 12.7,19.05 11.05,20.7 R1.1
N$6
  Bottom 0.305: LR5.A 25.27,49.28 LR4.K
N$7
  Bottom 0.305: D1.A 9.4,16.26 R3.2 10.41,14.48 T1.2
N$8
  Bottom 0.305: LG2.A 19.18,18.03 LG3.K
N$9
  Top 0.305: LG2.K 19.94,24.51 27.94,24.51 LG1.A
N$10
  Bottom 0.305: T2.3 32.64,16.26 32.64,23.24 31.88,24 31.88,24.89 LG1.K
N$11
  Top 0.305: D4.A D3.C
N$12
  Top 0.305: T2.1 36.7,13.97 34.54,16.13 R4.2
N$13
  Bottom 0.305: LR6.A 19.18,55.88 LR5.K
N$14
  Top 0.305: T2.2 35.69,16.51 35.69,18.8 36.45,19.56 37.85,19.56 D3.A R6.2
N$15
  Top 0.305: LB3.K 19.94,17.78 27.94,17.78 LB2.A
N$16
  Bottom 0.305: LB1.A 25.27,24.77 LB2.K
N$17
  Bottom 0.305: LB1.K 24,29.21 31.75,29.21 32.77,28.19 32.77,24.38 33.53,23.62 T3.3
N$18
  Bottom 0.305: D6.A D5.C
N$19
  Bottom 0.305: R7.2 39.12,26.16 T3.1
N$20
  Bottom 0.305: D9.A D8.C
N$21
  Top 0.305: R9.1 39.88,24.89 T3.2
  Bottom 0.305: D5.A 42.16,27.18 R9.1
N$22
  Top 0.305: IC2.3 11.18,26.16 11.18,26.29 | 11.18,26.29 11.18,26.8 C6.1 | D7.C 11.05,26.42 11.18,26.29
N$23
  Bottom 0.305: D8.A 9.4,47.37 R8.2 10.41,45.59 T4.2
N$24
  Bottom 0.305: LG5.A 19.18,49.15 LG4.K
N$25
  Top 0.305: LG5.K 19.94,55.63 27.94,55.63 LG6.A
N$26
  Top 0.305: D11.A D10.C
N$27
  Top 0.305: T5.2 35.69,47.62 35.69,49.91 36.45,50.67 37.85,50.67 D10.A R11.2
N$28
  Top 0.305: LB4.K 19.94,48.9 27.94,48.9 LB5.A
N$29
  Bottom 0.305: LB6.A 25.27,55.88 LB5.K
N$30
  Bottom 0.305: D13.A D12.C
N$31
  Top 0.305: R13.1 39.88,56.01 T6.2
  Bottom 0.305: D12.A 42.16,58.29 R13.1
N$32
  Top 0.305: T4.3 15.24,46.74 15.24,57.66 LR6.K
N$33
  Bottom 0.305: T4.1 12.7,47.12 12.7,50.16 11.05,51.82 R5.1
N$34
  Bottom 0.305: T5.3 32.64,47.37 32.64,54.36 31.88,55.12 31.88,56.01 LG6.K
N$35
  Top 0.305: T5.1 36.7,45.09 34.54,47.24 R10.2
N$36
  Bottom 0.305: LB6.K 24,60.33 31.75,60.33 32.77,59.31 32.77,55.5 33.53,54.74 T6.3
N$37
  Bottom 0.305: R12.2 39.12,57.28 T6.1
N$38
  Top 0.305: IC4.3 11.18,57.28 11.18,57.4 | 11.18,57.4 11.18,57.91 C12.1 | D14.C 11.05,57.53 11.18,57.4
N$39
  Bottom 0.305: LR8.A 25.27,80.39 LR7.K
N$40
  Bottom 0.305: LR9.A 19.18,87 LR8.K
N$41
  Bottom 0.305: D16.A D15.C
N$42
  Bottom 0.305: D15.A 9.4,78.49 R16.2 10.41,76.71 T7.2
N$43
  Bottom 0.305: LG8.A 19.18,80.26 LG7.K
N$44
  Top 0.305: LG8.K 19.94,86.74 27.94,86.74 LG9.A
N$45
  Top 0.305: D18.A D17.C
N$46
  Top 0.305: T8.2 35.69,78.74 35.69,81.03 36.45,81.79 37.85,81.79 D17.A R18.2
N$47
  Top 0.305: LB7.K 19.94,80.01 27.94,80.01 LB8.A
N$48
  Bottom 0.305: LB9.A 25.27,87 LB8.K
N$49
  Bottom 0.305: D20.A D19.C
N$50
  Top 0.305: R20.1 39.88,87.12 T9.2
  Bottom 0.305: D19.A 42.16,89.41 R20.1
N$51
  Top 0.305: T7.3 15.24,77.85 15.24,88.77 LR9.K
N$52
  Bottom 0.305: T7.1 12.7,78.23 12.7,81.28 11.05,82.93 R15.1
N$53
  Bottom 0.305: T8.3 32.64,78.49 32.64,85.47 31.88,86.23 31.88,87.12 LG9.K
N$54
  Top 0.305: T8.1 36.7,76.2 34.54,78.36 R17.2
N$55
  Bottom 0.305: LB9.K 24,91.44 31.75,91.44 32.77,90.42 32.77,86.61 33.53,85.85 T9.3
N$56
  Bottom 0.305: R19.2 39.12,88.39 T9.1
N$57
  Top 0.305: IC6.3 11.18,88.39 11.18,88.52 | 11.18,88.52 11.18,89.03 C18.1 | D21.C 11.05,88.65 11.18,88.52
N$58
  Bottom 0.305: LR11.A 75.44,18.16 LR10.K
N$59
  Bottom 0.305: LR12.A 69.34,24.77 LR11.K
N$60
  Bottom 0.305: D23.A D22.C
N$61
  Bottom 0.305: D22.A 59.56,16.26 R23.2 60.58,14.48 T10.2
N$62
  Bottom 0.305: LG11.A 69.34,18.03 LG10.K
N$63
  Top 0.305: LG11.K 70.1,24.51 78.11,24.51 LG12.A
N$64
  Top 0.305: D25.A D24.C
N$65
  Top 0.305: T11.2 85.85,16.51 85.85,18.8 86.61,19.56 88.01,19.56 D24.A R25.2
N$66
  Top 0.305: LB10.K 70.1,17.78 78.11,17.78 LB11.A
N$67
  Bottom 0.305: LB12.A 75.44,24.77 LB11.K
N$68
  Bottom 0.305: D27.A D26.C
N$69
  Top 0.305: R27.1 90.04,24.89 T12.2
  Bottom 0.305: D26.A 92.33,27.18 R27.1
N$70
  Top 0.305: T10.3 65.41,15.62 65.41,26.54 LR12.K
N$71
  Bottom 0.305: T10.1 62.87,16 62.87,19.05 61.21,20.7 R22.1
N$72
  Bottom 0.305: T11.3 82.8,16.26 82.8,23.24 82.04,24 82.04,24.89 LG12.K
N$73
  Top 0.305: T11.1 86.87,13.97 84.71,16.13 R24.2
N$74
  Bottom 0.305: LB12.K 74.17,29.21 81.92,29.21 82.93,28.19 82.93,24.38 83.69,23.62 T12.3
N$75
  Bottom 0.305: R26.2 89.28,26.16 T12.1
N$76
  Top 0.305: IC8.3 61.34,26.16 61.34,26.29 | 61.34,26.29 61.34,26.8 C24.1 | D28.C 61.21,26.42 61.34,26.29
N$77
  Bottom 0.305: LR14.A 75.44,49.28 LR13.K
N$78
  Bottom 0.305: LR15.A 69.34,55.88 LR14.K
N$79
  Bottom 0.305: D30.A D29.C
N$80
  Bottom 0.305: D29.A 59.56,47.37 R30.2 60.58,45.59 T13.2
N$81
  Bottom 0.305: LG14.A 69.34,49.15 LG13.K
N$82
  Top 0.305: LG14.K 70.1,55.63 78.11,55.63 LG15.A
N$83
  Top 0.305: D32.A D31.C
N$84
  Top 0.305: T14.2 85.85,47.62 85.85,49.91 86.61,50.67 88.01,50.67 D31.A R32.2
N$85
  Top 0.305: LB13.K 70.1,48.9 78.11,48.9 LB14.A
N$86
  Bottom 0.305: LB15.A 75.44,55.88 LB14.K
N$87
  Bottom 0.305: D34.A D33.C
N$88
  Top 0.305: R34.1 90.04,56.01 T15.2
  Bottom 0.305: D33.A 92.33,58.29 R34.1
N$89
  Top 0.305: T13.3 65.41,46.74 65.41,57.66 LR15.K
N$90
  Bottom 0.305: T13.1 62.87,47.12 62.87,50.16 61.21,51.82 R29.1
N$91
  Bottom 0.305: T14.3 82.8,47.37 82.8,54.36 82.04,55.12 82.04,56.01 LG15.K
N$92
  Top 0.305: T14.1 86.87,45.09 84.71,47.24 R31.2
N$93
  Bottom 0.305: LB15.K 74.17,60.33 81.92,60.33 82.93,59.31 82.93,55.5 83.69,54.74 T15.3
N$94
  Bottom 0.305: R33.2 89.28,57.28 T15.1
N$95
  Top 0.305: IC10.3 61.34,57.28 61.34,57.4 | 61.34,57.4 61.34,57.91 C30.1 | D35.C 61.21,57.53 61.34,57.4
N$96
  Bottom 0.305: LR17.A 75.44,80.39 LR16.K
N$97
  Bottom 0.305: LR18.A 69.34,87 LR17.K
N$98
  Bottom 0.305: D37.A D36.C
N$99
  Bottom 0.305: D36.A 59.56,78.49 R37.2 60.58,76.71 T16.2
N$100
  Bottom 0.305: LG17.A 69.34,80.26 LG16.K
N$101
  Top 0.305: LG17.K 70.1,86.74 78.11,86.74 LG18.A
N$102
  Top 0.305: D39.A D38.C
N$103
  Top 0.305: T17.2 85.85,78.74 85.85,81.03 86.61,81.79 88.01,81.79 D38.A R39.2
N$104
  Top 0.305: LB16.K 70.1,80.01 78.11,80.01 LB17.A
N$105
  Bottom 0.305: LB18.A 75.44,87 LB17.K
N$106
  Bottom 0.305: D41.A D40.C
N$107
  Top 0.305: R41.1 90.04,87.12 T18.2
  Bottom 0.305: D40.A 92.33,89.41 R41.1
N$108
  Top 0.305: T16.3 65.41,77.85 65.41,88.77 LR18.K
N$109
  Bottom 0.305: T16.1 62.87,78.23 62.87,81.28 61.21,82.93 R36.1
N$110
  Bottom 0.305: T17.3 82.8,78.49 82.8,85.47 82.04,86.23 82.04,87.12 LG18.K
N$111
  Top 0.305: T17.1 86.87,76.2 84.71,78.36 R38.2
N$112
  Bottom 0.305: LB18.K 74.17,91.44 81.92,91.44 82.93,90.42 82.93,86.61 83.69,85.85 T18.3
N$113
  Bottom 0.305: R40.2 89.28,88.39 T18.1
N$114
  Top 0.305: IC12.3 61.34,88.39 61.34,88.52 | 61.34,88.52 61.34,89.03 C36.1 | D42.C 61.21,88.65 61.34,88.52
RED  (via drill 0.6)
  Top 0.305: v34.92,7.49 36.58,7.49 v38.86,5.21
  Bottom 0.305: IC1.14 v38.86,5.21 | v34.92,7.49 10.79,7.49 9.65,8.64 9.65,12.7 R3.1
RED1  (via drill 0.6)
  Top 0.305: v34.92,38.61 36.58,38.61 v38.86,36.32
  Bottom 0.305: IC3.14 v38.86,36.32 | v34.92,38.61 10.79,38.61 9.65,39.75 9.65,43.81 R8.1
RED4  (via drill 0.6)
  Top 0.305: v34.92,69.72 36.58,69.72 v38.86,67.44
  Bottom 0.305: IC5.14 v38.86,67.44 | v34.92,69.72 10.79,69.72 9.65,70.87 9.65,74.93 R16.1
RED6  (via drill 0.6)
  Top 0.305: v85.09,7.49 86.74,7.49 v89.03,5.21
  Bottom 0.305: IC7.14 v89.03,5.21 | v85.09,7.49 60.96,7.49 59.82,8.64 59.82,12.7 R23.1
RED8  (via drill 0.6)
  Top 0.305: v85.09,38.61 86.74,38.61 v89.03,36.32
  Bottom 0.305: IC9.14 v89.03,36.32 | v85.09,38.61 60.96,38.61 59.82,39.75 59.82,43.81 R30.1
RED10  (via drill 0.6)
  Top 0.305: v85.09,69.72 86.74,69.72 v89.03,67.44
  Bottom 0.305: IC11.14 v89.03,67.44 | v85.09,69.72 60.96,69.72 59.82,70.87 59.82,74.93 R37.1
RST
  Bottom 0.305: U$1.RST 1.52,2.54 5.84,2.54 | 5.84,2.54 IC1.1 | 5.84,2.54 IC1.1 | IC1.1 5.84,2.54 | 5.84,2.54 5.84,3.05 7.11,4.32 7.11,11.05 R2.2
RST1
  Bottom 0.305: U$2.RST 1.52,33.66 5.84,33.66 | 5.84,33.66 IC3.1 | 5.84,33.66 IC3.1 | IC3.1 5.84,33.66 | 5.84,33.66 5.84,34.16 7.11,35.43 7.11,42.16 R14.2
RST2
  Bottom 0.305: U$3.RST 1.52,64.77 5.84,64.77 | 5.84,64.77 IC5.1 | 5.84,64.77 IC5.1 | IC5.1 5.84,64.77 | 5.84,64.77 5.84,65.28 7.11,66.55 7.11,73.28 R21.2
RST3
  Bottom 0.305: U$4.RST 51.69,2.54 56.01,2.54 | 56.01,2.54 IC7.1 | 56.01,2.54 IC7.1 | IC7.1 56.01,2.54 | 56.01,2.54 56.01,3.05 57.28,4.32 57.28,11.05 R28.2
RST4
  Bottom 0.305: U$5.RST 51.69,33.66 56.01,33.66 | 56.01,33.66 IC9.1 | 56.01,33.66 IC9.1 | IC9.1 56.01,33.66 | 56.01,33.66 56.01,34.16 57.28,35.43 57.28,42.16 R35.2
RST5
  Bottom 0.305: U$6.RST 51.69,64.77 56.01,64.77 | 56.01,64.77 IC11.1 | 56.01,64.77 IC11.1 | IC11.1 56.01,64.77 | 56.01,64.77 56.01,65.28 57.28,66.55 57.28,73.28 R42.2
RX  (via drill 0.6)
  Top 0.305: v45.97,16.51 v47.88,16.51
  Bottom 0.305: IC1.2 8.38,3.05 9.65,4.32 31.75,4.32 35.43,4.32 37.97,6.86 40.01,6.86 45.21,12.06 45.21,15.75 v45.97,16.51 | v47.88,16.51 47.88,14.35 SJ1.1
RX1  (via drill 0.6)
  Top 0.305: v45.97,47.62 v47.88,47.62
  Bottom 0.305: IC3.2 8.38,34.16 9.65,35.43 31.75,35.43 35.43,35.43 37.97,37.97 40.01,37.97 45.21,43.18 45.21,46.86 v45.97,47.62 | v47.88,47.62 47.88,45.47 SJ3.1
RX2  (via drill 0.6)
  Top 0.305: v45.97,78.74 v47.88,78.74
  Bottom 0.305: IC5.2 8.38,65.28 9.65,66.55 31.75,66.55 35.43,66.55 37.97,69.09 40.01,69.09 45.21,74.3 45.21,77.98 v45.97,78.74 | v47.88,78.74 47.88,76.58 SJ5.1
RX3  (via drill 0.6)
  Top 0.305: v96.14,16.51 v98.04,16.51
  Bottom 0.305: IC7.2 58.55,3.05 59.82,4.32 81.92,4.32 85.6,4.32 88.14,6.86 90.17,6.86 95.38,12.06 95.38,15.75 v96.14,16.51 | v98.04,16.51 98.04,14.35 SJ7.1
RX4  (via drill 0.6)
  Top 0.305: v96.14,47.62 v98.04,47.62
  Bottom 0.305: IC9.2 58.55,34.16 59.82,35.43 81.92,35.43 85.6,35.43 88.14,37.97 90.17,37.97 95.38,43.18 95.38,46.86 v96.14,47.62 | v98.04,47.62 98.04,45.47 SJ9.1
RX5  (via drill 0.6)
  Top 0.305: v96.14,78.74 v98.04,78.74
  Bottom 0.305: IC11.2 58.55,65.28 59.82,66.55 81.92,66.55 85.6,66.55 88.14,69.09 90.17,69.09 95.38,74.3 95.38,77.98 v96.14,78.74 | v98.04,78.74 98.04,76.58 SJ11.1
SCK  (via drill 0.6)
  Top 0.305: IC1.19 28.7,8.64 28.19,8.13 28.07,8 7.11,8 6.1,8 v4.06,5.97
  Bottom 0.305: v4.06,5.97 3.17,5.08 U$1.SCK
SCK1  (via drill 0.6)
  Top 0.305: IC3.19 28.7,39.75 28.19,39.24 28.07,39.12 7.11,39.12 6.1,39.12 v4.06,37.08
  Bottom 0.305: v4.06,37.08 3.17,36.2 U$2.SCK
SCK2  (via drill 0.6)
  Top 0.305: IC5.19 28.7,70.87 28.19,70.36 28.07,70.23 7.11,70.23 6.1,70.23 v4.06,68.2
  Bottom 0.305: v4.06,68.2 3.17,67.31 U$3.SCK
SCK3  (via drill 0.6)
  Top 0.305: IC7.19 78.87,8.64 78.36,8.13 78.23,8 57.28,8 56.26,8 v54.23,5.97
  Bottom 0.305: v54.23,5.97 53.34,5.08 U$4.SCK
SCK4  (via drill 0.6)
  Top 0.305: IC9.19 78.87,39.75 78.36,39.24 78.23,39.12 57.28,39.12 56.26,39.12 v54.23,37.08
  Bottom 0.305: v54.23,37.08 53.34,36.2 U$5.SCK
SCK5  (via drill 0.6)
  Top 0.305: IC11.19 78.87,70.87 78.36,70.36 78.23,70.23 57.28,70.23 56.26,70.23 v54.23,68.2
  Bottom 0.305: v54.23,68.2 53.34,67.31 U$6.SCK
TX
  Bottom 0.305: IC1.3 10.92,3.05 11.68,3.81 31.75,3.81 35.69,3.81 38.23,6.35 40.26,6.35 46.1,12.19 SJ2.1
TX1
  Bottom 0.305: IC3.3 10.92,34.16 11.68,34.92 31.75,34.92 35.69,34.92 38.23,37.47 40.26,37.47 46.1,43.31 SJ4.1
TX2
  Bottom 0.305: IC5.3 10.92,65.28 11.68,66.04 31.75,66.04 35.69,66.04 38.23,68.58 40.26,68.58 46.1,74.42 SJ6.1
TX3
  Bottom 0.305: IC7.3 61.09,3.05 61.85,3.81 81.92,3.81 85.85,3.81 88.39,6.35 90.42,6.35 96.27,12.19 SJ8.1
TX4
  Bottom 0.305: IC9.3 61.09,34.16 61.85,34.92 81.92,34.92 85.85,34.92 88.39,37.47 90.42,37.47 96.27,43.31 SJ10.1
TX5
  Bottom 0.305: IC11.3 61.09,65.28 61.85,66.04 81.92,66.04 85.85,66.04 88.39,68.58 90.42,68.58 96.27,74.42 SJ12.1
XTAL1
  Top 0.305: C3.1 45.09,9.65 Q1.1 39.75,4.32 30.61,4.32 27.43,4.32 26.16,3.05 IC1.9
XTAL2
  Top 0.305: C4.1 46.86,3.81 Q1.2 30.35,3.81 | 30.86,3.81 30.35,3.81 | 30.35,3.81 29.59,3.81 28.7,2.92 IC1.10
XTAL3
  Top 0.305: C9.1 45.09,40.77 Q2.1 39.75,35.43 30.61,35.43 27.43,35.43 26.16,34.16 IC3.9
XTAL4
  Top 0.305: C10.1 46.86,34.92 Q2.2 30.35,34.92 | 30.86,34.92 30.35,34.92 | 30.35,34.92 29.59,34.92 28.7,34.04 IC3.10
XTAL5
  Top 0.305: C15.1 45.09,71.88 Q3.1 39.75,66.55 30.61,66.55 27.43,66.55 26.16,65.28 IC5.9
XTAL6
  Top 0.305: C16.1 46.86,66.04 Q3.2 30.35,66.04 | 30.86,66.04 30.35,66.04 | 30.35,66.04 29.59,66.04 28.7,65.15 IC5.10
XTAL7
  Top 0.305: C21.1 95.25,9.65 Q4.1 89.92,4.32 80.77,4.32 77.6,4.32 76.33,3.05 IC7.9
XTAL8
  Top 0.305: C22.1 97.03,3.81 Q4.2 80.52,3.81 | 81.03,3.81 80.52,3.81 | 80.52,3.81 79.76,3.81 78.87,2.92 IC7.10
XTAL9
  Top 0.305: C27.1 95.25,40.77 Q5.1 89.92,35.43 80.77,35.43 77.6,35.43 76.33,34.16 IC9.9
XTAL10
  Top 0.305: C28.1 97.03,34.92 Q5.2 80.52,34.92 | 81.03,34.92 80.52,34.92 | 80.52,34.92 79.76,34.92 78.87,34.04 IC9.10
XTAL11
  Top 0.305: C33.1 95.25,71.88 Q6.1 89.92,66.55 80.77,66.55 77.6,66.55 76.33,65.28 IC11.9
XTAL12
  Top 0.305: C34.1 97.03,66.04 Q6.2 80.52,66.04 | 81.03,66.04 80.52,66.04 | 80.52,66.04 79.76,66.04 78.87,65.15 IC11.10

## Text on the board
tPlace: flm | flm | v4 | v4 | flm | flm | v4 | v4 | flm | flm | v4 | v4
bPlace: 0l.de | 0l.de | 0l.de | 0l.de | 0l.de | 0l.de
_tNames: C6 | C6 | T3 | D5 | T3 | D5 | LR1 | LB1 | LG1 | D6 | LR1 | LB1 | LG1 | D6 | D7 | D7 | R1 | R9 | R1 | R9 | R7 | R7 | IC2 | LG2 | LR2 | LB2 | D4 | IC2 | LG2 | LR2 | LB2 | D4 | R6 | R6 | D1 | D2 | D1 | D2 | R4 | D3 | R4 | D3 | C1 | T1 | C1 | T1 | LB3 | LG3 | LR3 | LB3 | LG3 | LR3 | R2 | R3 | T2 | R2 | R3 | T2 | C2 | C2 | C5 | C5 | IC1 | IC1 | Q1 | Q1 | C4 | C3 | C4 | C3 | C6 | C6 | T3 | D5 | T3 | D5 | LR1 | LB1 | LG1 | D6 | LR1 | LB1 | LG1 | D6 | D7 | D7 | R1 | R9 | R1 | R9 | R7 | R7 | IC2 | D4 | IC2 | D4 | LG2 | LR2 | LB2 | LG2 | LR2 | LB2 | R6 | R6 | D1 | D2 | D1 | D2 | R4 | R4 | C1 | T1 | D3 | C1 | T1 | D3 | LB3 | LG3 | LR3 | LB3 | LG3 | LR3 | R2 | R3 | R2 | R3 | T2 | T2 | C5 | C2 | C5 | C2 | IC1 | Q1 | IC1 | Q1 | C4 | C3 | C4 | C3 | C6 | C6 | T3 | T3 | LR1 | LB1 | LG1 | D6 | D5 | LR1 | LB1 | LG1 | D6 | D5 | D7 | D7 | R1 | R9 | R1 | R9 | R7 | R7 | IC2 | D4 | IC2 | D4 | LG2 | LR2 | LB2 | LG2 | LR2 | LB2 | R6 | R6 | D1 | D2 | D1 | D2 | R4 | R4 | C1 | D3 | C1 | D3 | T1 | T1 | LB3 | LG3 | LR3 | LB3 | LG3 | LR3 | R2 | R3 | R2 | R3 | T2 | T2 | C5 | C2 | C5 | C2 | IC1 | Q1 | IC1 | Q1 | C4 | C3 | C4 | C3
_bNames: SJ1 | SJ1 | SJ2 | SJ2 | INT | INT | SJ1 | SJ1 | SJ2 | SJ2 | INT | INT | SJ1 | SJ1 | SJ2 | SJ2 | INT | INT